# EAGLE board main-copy-cap-touch (EAGLE 8.5.0)
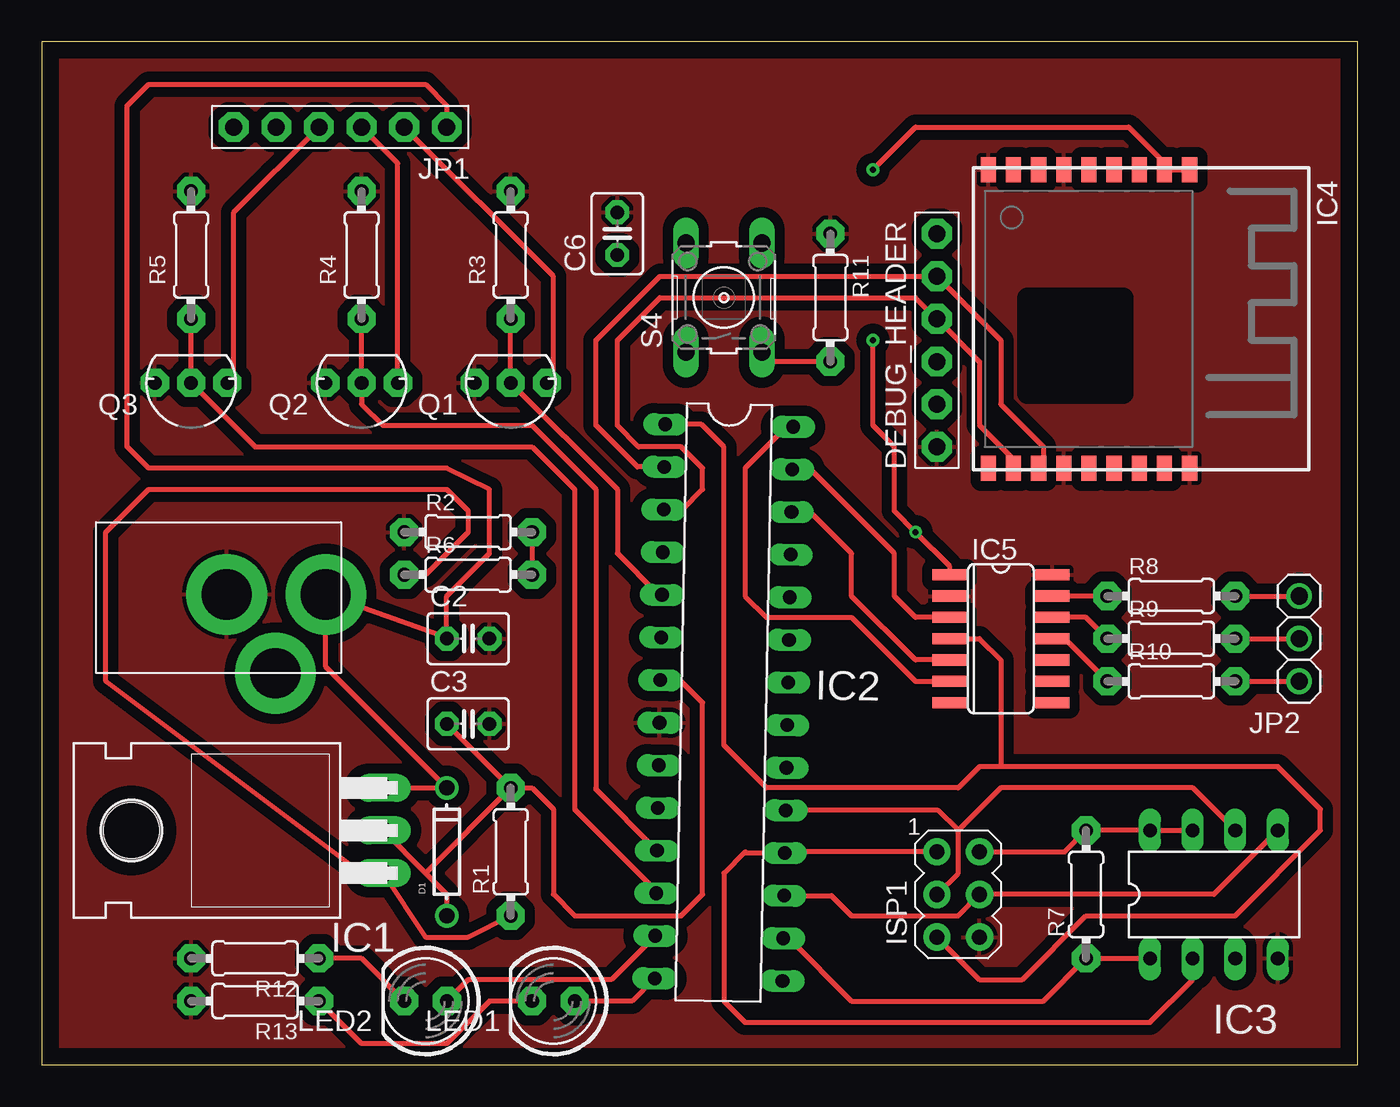
[diagram p0: board, top side]
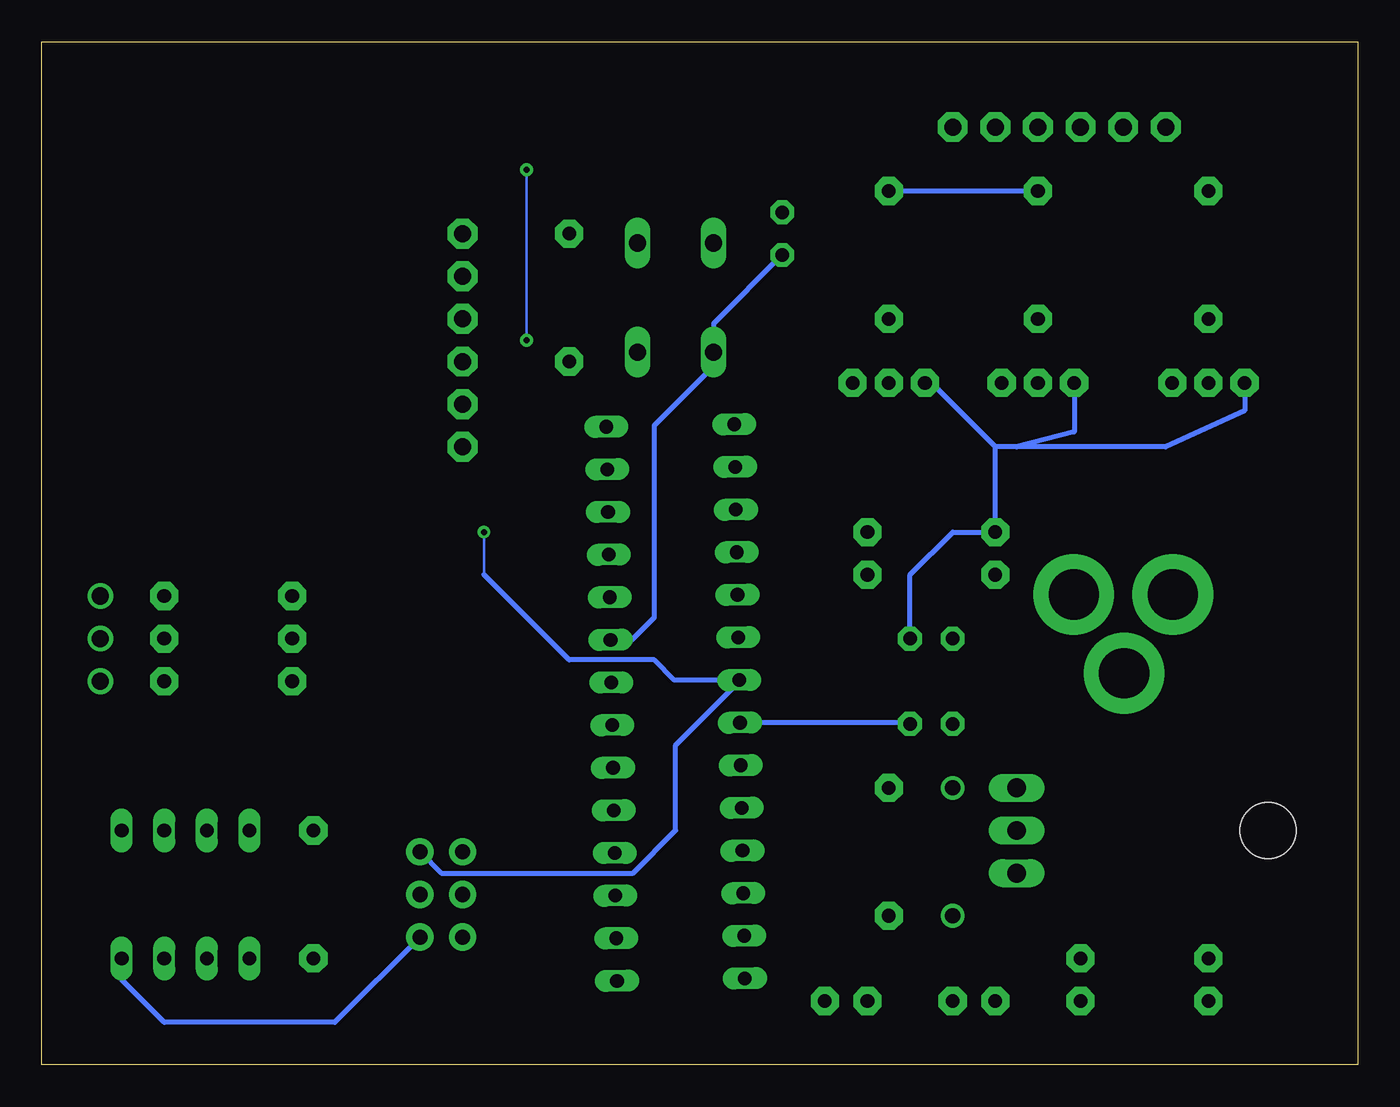
[diagram p1: board, bottom side, seen from below]

Size 78.41 x 60.95 mm. Coordinates in mm from the lower left corner, seen from the top.
Outline: 0,0 78.41,0 78.41,60.95 0,60.95 0,0
Copper layers (1*16): Top 0.035mm / dielectric 1.5mm / Bottom 0.035mm
Design rules "default": minimum track width 6mil, minimum drill 0.35mm, track to track 6mil, track to pad 6mil, pad to pad 6mil, via to via 6mil, smd to smd 6mil, copper to edge 40mil, drill to drill 6mil, minimum pad ring 10mil, minimum via ring 8mil, stop-mask expansion 4mil, vias tented up to drill 0mil, thermal gap 10mil

## Footprints (pad centres in the part's own frame; a part is rotated, then mirrored left to right if it is on the bottom)
C025-030X050 = drill 0.813 pad 1.422 octagon: 1 -1.27,0; 2 1.27,0
DO-1N4148 = drill 0.9: A -3.81,0; C 3.81,0
1X06-BIG = drill 1.016 pad 1.778 octagon: 1 -6.35,0; 2 -3.81,0; 3 -1.27,0; 4 1.27,0; 5 3.81,0; 6 6.35,0
TO220H = drill 1.118 long: 1 -2.54,-10.16; 2 0,-10.16; 3 2.54,-10.16 | hole 3.302: 0,4.826
DIL28-3 = drill 0.813 long: 1 -16.51,-3.81; 2 -13.97,-3.81; 3 -11.43,-3.81; 4 -8.89,-3.81; 5 -6.35,-3.81; 6 -3.81,-3.81; 7 -1.27,-3.81; 8 1.27,-3.81; 9 3.81,-3.81; 10 6.35,-3.81; 11 8.89,-3.81; 12 11.43,-3.81; 13 13.97,-3.81; 14 16.51,-3.81; 15 16.51,3.81; 16 13.97,3.81; 17 11.43,3.81; 18 8.89,3.81; 19 6.35,3.81; 20 3.81,3.81; 21 1.27,3.81; 22 -1.27,3.81; 23 -3.81,3.81; 24 -6.35,3.81; 25 -8.89,3.81; 26 -11.43,3.81; 27 -13.97,3.81; 28 -16.51,3.81
DIL8 = drill 0.813 long: 1 -3.81,-3.81; 2 -1.27,-3.81; 3 1.27,-3.81; 4 3.81,-3.81; 5 3.81,3.81; 6 1.27,3.81; 7 -1.27,3.81; 8 -3.81,3.81
FRONT-FACE = smd 1.485 x 0.9: 1 -8.893,4.9; 2 -8.893,3.4; 3 -8.893,1.9; 4 -8.893,0.4; 5 -8.893,-1.1; 6 -8.893,-2.6; 7 -8.893,-4.1; 8 -8.893,-5.6; 9 -8.893,-7.1; 10 8.893,-7.1; 11 8.893,-5.6; 12 8.893,-4.1; 13 8.893,-2.6; 14 8.893,-1.1; 15 8.893,0.4; 16 8.893,1.9; 17 8.893,3.4; 18 8.893,4.9
SO14 = smd 0.66 x 2.032: 1 -3.81,-3.073; 2 -2.54,-3.073; 3 -1.27,-3.073; 4 0,-3.073; 5 1.27,-3.073; 6 2.54,-3.073; 7 3.81,-3.073; 8 3.81,3.073; 9 2.54,3.073; 10 1.27,3.073; 11 0,3.073; 12 -1.27,3.073; 13 -2.54,3.073; 14 -3.81,3.073
AVRISP = drill 0.9 pad 1.626: 1 -1.27,2.54; 2 1.27,2.54; 3 -1.27,0; 4 1.27,0; 5 -1.27,-2.54; 6 1.27,-2.54
1X03 = drill 1.016: 1 -2.54,0; 2 0,0; 3 2.54,0
LED5MM = drill 0.813 pad 1.676 octagon: A -1.27,0; K 1.27,0
TO92-INLINE = drill 0.813 pad 1.676 octagon: 1 -2.159,0; 2 0,0; 3 2.159,0
0204/7 = drill 0.813 pad 1.676 octagon: 1 -3.81,0; 2 3.81,0
B3F-10XX = drill 1.016 long: 1 -3.251,2.261; 2 3.251,2.261; 3 -3.251,-2.261; 4 3.251,-2.261
PJ-102A = drill 3 pad 4.8: RING 0.1,-3.39; RING_SW -4.6,-6.29; TIP 0.1,-9.29

## Placement (x,y rotation side)
C2  0.1uF  [C025-030X050]  25.4,25.4 0 top
C3  1.0uF  [C025-030X050]  25.4,20.32 0 top
C6  0.1uF  [C025-030X050]  34.29,49.53 90 top
D1  [DO-1N4148]  24.13,12.7 90 top
DEBUG_HEADER  [1X06-BIG]  53.34,43.18 90 top
IC1  317T  [TO220H]  10.16,13.97 90 top
IC2  ATMEGA168-20P  [DIL28-3]  40.64,21.59 268.9 top
IC3  25LC080P  [DIL8]  69.85,10.16 0 top
IC4  ESP-WROOM-02FRONT-FACE  [FRONT-FACE]  63.5,44.45 270 top
IC5  AT42QT1070-SSU  [SO14]  57.15,25.4 270 top
ISP1  AVRISP-6  [AVRISP]  54.61,10.16 0 top
JP1  [1X06-BIG]  17.78,55.88 180 top
JP2  [1X03]  74.93,25.4 90 top
LED1  [LED5MM]  30.48,3.81 180 top
LED2  [LED5MM]  22.86,3.81 180 top
Q1  FQN1N50CI  [TO92-INLINE]  27.94,40.64 180 top
Q2  FQN1N50CI  [TO92-INLINE]  19.05,40.64 180 top
Q3  FQN1N50CI  [TO92-INLINE]  8.89,40.64 180 top
R1  240  [0204/7]  27.94,12.7 90 top
R2  390  [0204/7]  25.4,31.75 0 top
R3  10K  [0204/7]  27.94,48.26 270 top
R4  10K  [0204/7]  19.05,48.26 270 top
R5  10K  [0204/7]  8.89,48.26 270 top
R6  10  [0204/7]  25.4,29.21 0 top
R7  10K  [0204/7]  62.23,10.16 90 top
R8  10K  [0204/7]  67.31,27.94 0 top
R9  10K  [0204/7]  67.31,25.4 0 top
R10  10K  [0204/7]  67.31,22.86 0 top
R11  1K  [0204/7]  46.99,45.72 270 top
R12  470  [0204/7]  12.7,6.35 180 top
R13  470  [0204/7]  12.7,3.81 180 top
S4  [B3F-10XX]  40.64,45.72 90 top
U$1  2.1MMJACKTHM  [PJ-102A]  7.62,27.94 90 top

## Library data of the parts
C2 C3 C6 D1 DEBUG_HEADER IC2 IC5 ISP1 JP1 JP2 LED1 LED2 Q1-Q3 R1-R13 U$1 = adafruit
IC1 = linear
IC3 = microchip; MF: MICROCHIP; MPN: 25LC080/P; OC_FARNELL: 1556143; OC_NEWARK: 92C7440
IC4 = esp-wroom-02
S4 = switch-omron; MPN: B3F-1000; OC_FARNELL: 176432; OC_NEWARK: 36M3542

## Nets
CHANGE: IC2.26 IC5.5
ERROR_LED: IC2.13 LED2.A
GND: C2.2 C3.2 C6.2 DEBUG_HEADER.1 IC2.8 IC3.4 IC4.6 IC4.9 IC4.13 IC4.18 IC5.2 IC5.14 ISP1.6 Q1.3 Q2.3 Q3.3 R2.1 R3.1 R4.1 R5.1 R11.1 R12.2 R13.2 U$1.RING
KEY_0: JP2.3 R8.2
KEY_1: JP2.2 R9.2
KEY_2: JP2.1 R10.2
MAS_RX: DEBUG_HEADER.5 IC2.2 IC4.12
MAS_TX: DEBUG_HEADER.4 IC2.3 IC4.11
MISO: IC2.18 IC3.2 ISP1.1
MOSI: IC2.17 IC3.5 ISP1.4
N$1: IC5.13 R8.1
N$2: IC5.12 R9.1
N$3: IC5.11 R10.1
N$4: R2.2 R6.2
N$6: IC1.1 R1.1 R6.1
N$8: JP1.2 Q1.1
N$9: LED1.K R13.1
N$10: LED2.K R12.1
N$11: JP1.3 Q2.1
N$13: JP1.4 Q3.1
N$14: R11.2 S4.3
Q1_GATE: IC2.5 Q1.2 R3.2
Q2_GATE: IC2.11 Q2.2 R4.2
Q3_GATE: IC2.12 Q3.2 R5.2
RST: IC2.1 IC5.4 ISP1.5
SCK: IC2.19 IC3.6 ISP1.3
SCL: IC2.28 IC5.6
SDA: IC2.27 IC5.3
SN_PROG_EN: C6.1 IC2.23 S4.1
SS: IC2.16 IC3.1 R7.1
STATUS_LED: IC2.14 LED1.A
VCC: C3.1 D1.A IC1.2 IC2.7 IC3.7 IC3.8 IC4.1 IC4.2 IC5.1 ISP1.2 R1.2 R7.2
VIN: C2.1 D1.C IC1.3 JP1.1 U$1.TIP

## Tracks (layer width: path | path; a pad name or v marks a point on that pad's centre or on a via)
CHANGE
  Top 0.305: IC5.5 52.07,24.13 48.26,27.94 48.26,30.48 45.8,32.94 IC2.26
ERROR_LED
  Top 0.305: IC2.13 33.95,5.08 25.4,5.08 LED2.A
GND
  Bottom 0.305: ISP1.6 60.96,2.54 71.12,2.54 73.66,5.08 IC3.4 | C2.2 26.67,29.21 24.13,31.75 R2.1 21.59,36.83 | Q1.3 25.4,40.64 21.59,36.83 | C3.2 26.74,20.39 IC2.8 | Q3.3 6.73,38.99 11.43,36.83 20.32,36.83 | Q2.3 16.89,37.72 20.32,36.83 | 20.32,36.83 21.59,36.83 | R4.1 R3.1
  pour Top (isolate 0.61): -2.54,62.23 80.01,62.23 80.01,-6.35 -3.81,-6.35 -3.81,60.96
KEY_0
  Top 0.305: R8.2 JP2.3
KEY_1
  Top 0.305: R9.2 JP2.2
KEY_2
  Top 0.305: R10.2 JP2.1
MAS_RX
  Top 0.305: IC4.12 59.69,35.85 59.69,36.83 57.15,39.37 57.15,43.18 DEBUG_HEADER.5 36.83,46.99 33.02,43.18 33.02,38.1 35.49,35.63 IC2.2
MAS_TX
  Top 0.305: IC4.11 57.9,36.08 55.88,38.1 55.88,41.91 DEBUG_HEADER.4 52.07,45.72 36.83,45.72 34.29,43.18 34.29,38.1 35.56,36.83 38.1,36.83 39.37,35.56 39.37,34.29 38.17,33.09 IC2.3
MISO
  Top 0.305: ISP1.1 44.35,12.7 IC2.18 41.98,12.63 41.91,12.7 40.64,11.43 40.64,3.81 41.91,2.54 66.04,2.54 68.58,5.08 IC3.2
MOSI
  Top 0.305: IC2.17 47.06,10.09 48.26,8.89 54.61,8.89 ISP1.4 69.85,10.16 IC3.5
N$1
  Top 0.305: R8.1 IC5.13
N$2
  Top 0.305: R9.1 62.23,26.67 IC5.12
N$3
  Top 0.305: R10.1 60.96,25.4 IC5.11
N$4
  Top 0.305: R2.2 R6.2
N$6
  Top 0.305: R6.1 22.86,29.21 25.4,31.75 25.4,33.02 24.13,34.29 6.35,34.29 3.81,31.75 3.81,22.86 19.05,11.43 IC1.1 22.86,7.62 25.4,7.62 R1.1
N$8
  Top 0.305: Q1.1 30.48,41.02 30.48,46.99 JP1.2
N$9
  Top 0.305: LED1.K 26.67,3.81 24.13,1.27 19.05,1.27 R13.1
N$10
  Top 0.305: LED2.K 19.05,6.35 R12.1
N$11
  Top 0.305: Q2.1 21.21,53.72 JP1.3
N$13
  Top 0.305: Q3.1 11.43,41.02 11.43,50.8 JP1.4
N$14
  Top 0.305: R11.2 43.46,41.91 S4.3
Q1_GATE
  Top 0.305: R3.2 Q1.2 34.29,34.29 34.29,30.48 36.76,28.01 IC2.5
Q2_GATE
  Top 0.305: R4.2 Q2.2 19.05,39.37 20.32,38.1 29.21,38.1 33.02,34.29 33.02,16.51 33.02,16.41 IC2.11
Q3_GATE
  Top 0.305: R5.2 Q3.2 12.7,36.83 29.21,36.83 31.75,34.29 31.75,15.24 36.61,10.38 IC2.12
RST
  Top 0.152: 38.03,38.17 IC2.1
  Top 0.305: 57.15,17.78 73.66,17.78 76.2,15.24 76.2,13.97 71.12,8.89 62.23,8.89 58.42,5.08 55.88,5.08 ISP1.5 | 57.15,17.78 55.88,17.78 54.61,16.51 43.18,16.51 40.64,19.05 40.64,36.83 39.3,38.17 IC2.1 | IC5.4 55.88,25.4 57.15,24.13 57.15,17.78
SCK
  Top 0.305: ISP1.3 54.61,11.43 54.61,13.97 | 54.61,13.97 53.41,15.17 IC2.19 | IC3.6 68.58,16.51 57.15,16.51 54.61,13.97
SCL
  Top 0.305: IC2.28 44.37,38.02 41.91,35.56 41.91,27.94 43.18,26.67 48.26,26.67 52.07,22.86 IC5.6
SDA
  Top 0.305: IC5.3 52.07,26.67 50.8,27.94 50.8,30.48 45.8,35.48 IC2.27
SN_PROG_EN
  Bottom 0.305: IC2.23 43.25,25.33 41.91,26.67 41.91,38.1 38.38,41.63 38.38,41.91 S4.1 38.38,44.17 C6.1
SS
  Top 0.305: IC3.1 R7.1 59.69,3.81 48.26,3.81 44.52,7.55 IC2.16 44.25,7.62
STATUS_LED
  Top 0.305: IC2.14 35.17,3.81 LED1.A
VCC  (via drill 0.35)
  Top 0.305: IC1.2 22.86,11.43 | 22.86,11.43 24.13,10.16 D1.A | R1.2 22.86,11.43 | C3.1 R1.2 | IC3.7 IC3.8 R7.2 60.96,12.7 ISP1.2 | R1.2 29.21,16.51 30.48,15.24 30.48,10.16 31.75,8.89 38.1,8.89 39.37,10.16 39.37,21.59 38.03,22.93 IC2.7 | IC5.1 54.08,29.74 v52.07,31.75 50.8,33.02 50.8,36.83 49.53,38.1 v49.53,43.18 | v49.53,53.34 52.07,55.88 64.77,55.88 67.31,53.34 | 67.31,53.34 IC4.1 | IC4.2 67.31,53.34
  Bottom 0.152: 52.07,29.21 v52.07,31.75 | v49.53,43.18 v49.53,53.34
  Bottom 0.305: ISP1.2 54.61,11.43 43.18,11.43 40.64,13.97 40.64,19.05 36.86,22.83 IC2.7 40.71,22.93 41.91,24.13 46.99,24.13 52.07,29.21
VIN
  Top 0.305: IC1.3 D1.C 16.91,23.73 U$1.TIP 24.03,25.5 C2.1 24.13,27.94 26.67,30.48 26.67,34.29 24.13,35.56 6.35,35.56 5.08,36.83 5.08,57.15 6.35,58.42 22.86,58.42 24.13,57.15 JP1.1

## Text on the board
tDocu: R Melpignano